# EAGLE board Master Shield (EAGLE 9.1.3)
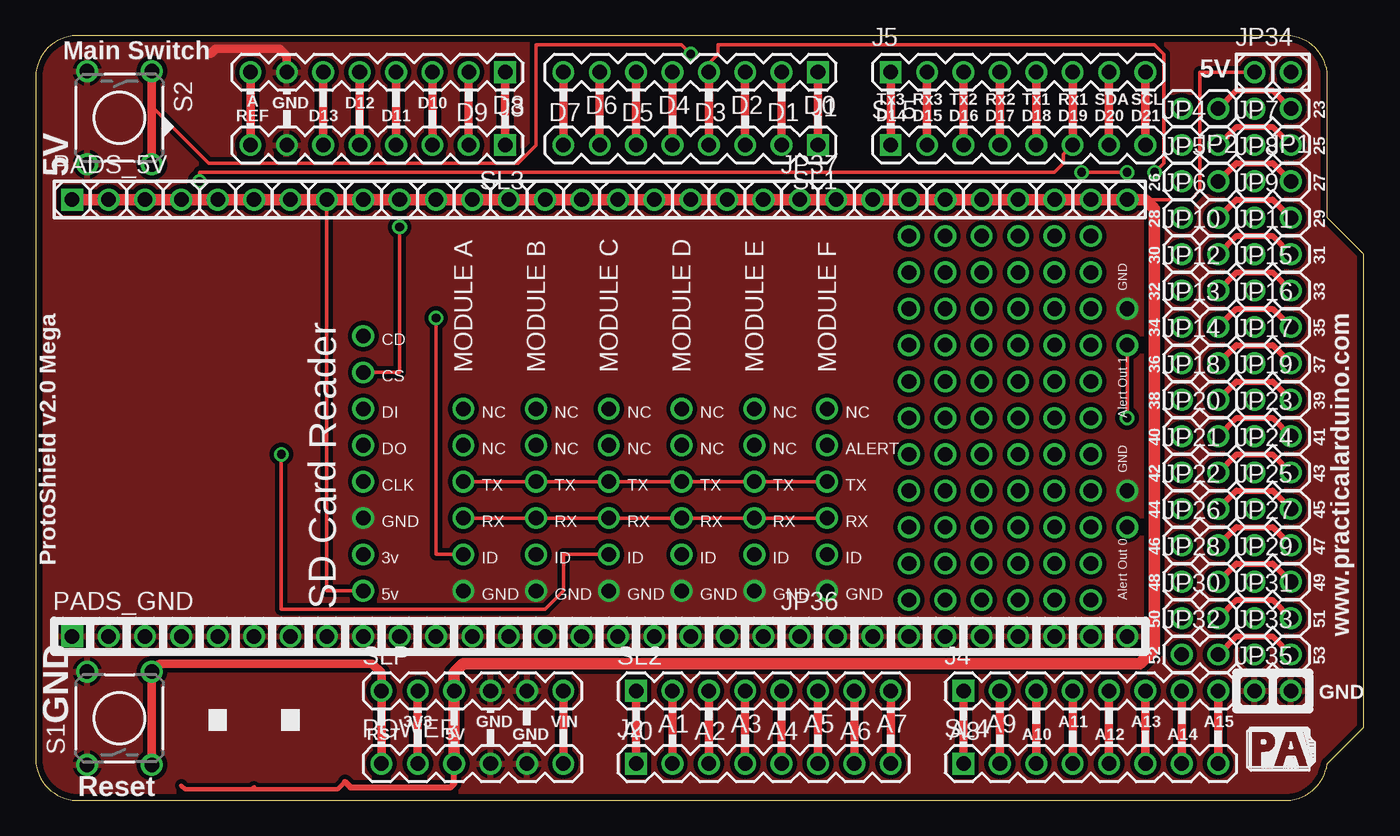
[diagram p0: board, top side]
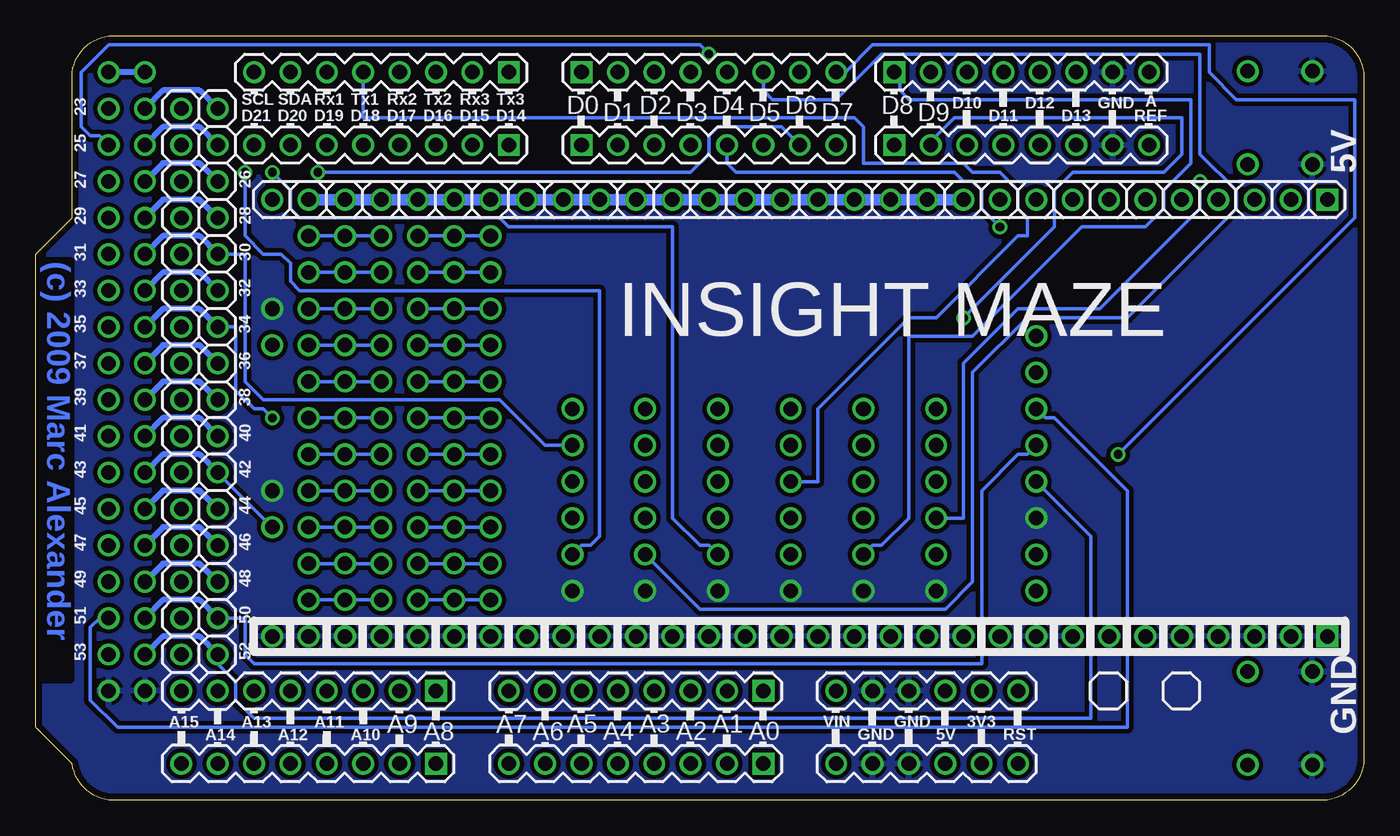
[diagram p1: board, bottom side, seen from below]

Size 92.71 x 53.34 mm. Coordinates in mm from the lower left corner, seen from the top.
Outline: 0,2.54 arc74 2.54,0 87.63,0 arc74 90.17,2.54 92.71,5.08 92.71,38.1 90.17,40.64 90.17,50.8 arc74 87.63,53.34 2.54,53.34 arc74 0,50.8 0,2.54
Copper layers (1*16): Top 0.035mm / dielectric 1.5mm / Bottom 0.035mm
Design rules "default *": minimum track width 10mil, minimum drill 24mil, track to track 12mil, track to pad 12mil, pad to pad 12mil, via to via 12mil, smd to smd 8mil, copper to edge 18mil, drill to drill 8mil, minimum pad ring 10mil, minimum via ring 8mil, stop-mask expansion 4mil, vias tented up to drill 0mil, thermal gap 10mil

## Footprints (pad centres in the part's own frame; a part is rotated, then mirrored left to right if it is on the bottom)
1X08 = drill 1.016 square: 1 0,0 | drill 1.016: 2 2.54,0; 3 5.08,0; 4 7.62,0; 5 10.16,0; 6 12.7,0; 7 15.24,0; 8 17.78,0
1X02 = drill 1.016: 1 0,0; 2 2.54,0
1X10 = drill 1.016: 1 0,0; 2 2.54,0; 3 5.08,0; 4 7.62,0; 5 10.16,0; 6 12.7,0; 7 15.24,0; 8 17.78,0; 9 20.32,0; 10 22.86,0
1X20 = drill 1.016 square: 1 0,0 | drill 1.016: 2 2.54,0; 3 5.08,0; 4 7.62,0; 5 10.16,0; 6 12.7,0; 7 15.24,0; 8 17.78,0; 9 20.32,0; 10 22.86,0; 11 25.4,0; 12 27.94,0; 13 30.48,0; 14 33.02,0; 15 35.56,0; 16 38.1,0; 17 40.64,0; 18 43.18,0; 19 45.72,0; 20 48.26,0
1X06 = drill 1.016: 1 0,0; 2 2.54,0; 3 5.08,0; 4 7.62,0; 5 10.16,0; 6 12.7,0
TACTILE-PTH = drill 1.016: 1 -3.251,2.261; 2 3.251,2.261; 3 -3.251,-2.261; 4 3.251,-2.261

## Placement (x,y rotation side)
J1  Digital_0_7  [1X08]  54.61,50.8 180 top
J2  Analog  [1X08]  41.91,2.54 0 top
J3  Digital_8_13  [1X08]  32.77,50.8 180 top
J4  Analog  [1X08]  64.77,7.62 0 top
J5  Digital_14_21  [1X08]  59.69,50.8 0 top
JP1  [1X02]  87.63,48.26 180 top
JP2  [1X02]  82.55,48.26 180 top
JP4  [1X02]  80.01,45.72 0 top
JP5  [1X02]  80.01,43.18 0 top
JP6  [1X02]  80.01,40.64 0 top
JP7  [1X02]  85.09,45.72 0 top
JP8  [1X02]  85.09,43.18 0 top
JP9  [1X02]  85.09,40.64 0 top
JP10  [1X02]  80.01,38.1 0 top
JP11  [1X02]  85.09,38.1 0 top
JP12  [1X02]  80.01,35.56 0 top
JP13  [1X02]  80.01,33.02 0 top
JP14  [1X02]  80.01,30.48 0 top
JP15  [1X02]  85.09,35.56 0 top
JP16  [1X02]  85.09,33.02 0 top
JP17  [1X02]  85.09,30.48 0 top
JP18  [1X02]  80.01,27.94 0 top
JP19  [1X02]  85.09,27.94 0 top
JP20  [1X02]  80.01,25.4 0 top
JP21  [1X02]  80.01,22.86 0 top
JP22  [1X02]  80.01,20.32 0 top
JP23  [1X02]  85.09,25.4 0 top
JP24  [1X02]  85.09,22.86 0 top
JP25  [1X02]  85.09,20.32 0 top
JP26  [1X02]  80.01,17.78 0 top
JP27  [1X02]  85.09,17.78 0 top
JP28  [1X02]  80.01,15.24 0 top
JP29  [1X02]  85.09,15.24 0 top
JP30  [1X02]  80.01,12.7 0 top
JP31  [1X02]  85.09,12.7 0 top
JP32  [1X02]  80.01,10.16 0 top
JP33  [1X02]  85.09,10.16 0 top
JP34  [1X02]  85.09,50.8 0 top
JP35  [1X02]  85.09,7.62 0 top
JP36  M100.1  [1X10]  53.34,11.43 0 top
JP37  M100.1  [1X10]  53.34,41.91 0 top
PADS_5V  M20  [1X20]  2.54,41.91 0 top
PADS_GND  M20  [1X20]  2.54,11.43 0 top
POWER  Power  [1X06]  24.13,2.54 0 top
S1  RESET  [TACTILE-PTH]  5.84,5.71 90 top
S2  SWITCH  [TACTILE-PTH]  5.84,47.62 270 top
SL1  Digital_0_7  [1X08]  54.61,45.72 180 top
SL2  Analog  [1X08]  41.91,7.62 0 top
SL3  Digital_8_13  [1X08]  32.77,45.72 180 top
SL4  Analog  [1X08]  64.77,2.54 0 top
SL5  Digital_14_21  [1X08]  59.69,45.72 0 top
SLP  Power  [1X06]  24.13,7.62 0 top
U$4  [PRACTICALARDUINO-LOGO]  84.58,2.03 0 top

## Library data of the parts
J1-J5 JP1 JP2 JP4-JP37 PADS_5V PADS_GND POWER S1 S2 SL1-SL5 SLP U$4 = SparkFun

## Nets
3V3: POWER.2 SLP.2
5V: JP34.1 JP34.2 JP37.1 JP37.2 JP37.3 JP37.4 JP37.5 JP37.6 JP37.7 JP37.8 JP37.9 JP37.10 PADS_5V.1 PADS_5V.2 PADS_5V.3 PADS_5V.4 PADS_5V.5 PADS_5V.6 PADS_5V.7 PADS_5V.8 PADS_5V.9 PADS_5V.10 PADS_5V.11 PADS_5V.12 PADS_5V.13 PADS_5V.14 PADS_5V.15 PADS_5V.16 PADS_5V.17 PADS_5V.18 PADS_5V.19 PADS_5V.20 POWER.3 SLP.3
A0: J2.1 SL2.1
A1: J2.2 SL2.2
A2: J2.3 SL2.3
A3: J2.4 SL2.4
A4: J2.5 SL2.5
A5: J2.6 SL2.6
A6: J2.7 SL2.7
A7: J2.8 SL2.8
A8: J4.1 SL4.1
A9: J4.2 SL4.2
A10: J4.3 SL4.3
A11: J4.4 SL4.4
A12: J4.5 SL4.5
A13: J4.6 SL4.6
A14: J4.7 SL4.7
A15: J4.8 SL4.8
AREF: J3.8 SL3.8
D0_RX: J1.1 SL1.1
D1: JP10.2 JP11.2
D1_TX: J1.2 SL1.2
D2: J1.3 SL1.3
D3: J1.4 SL1.4
D4: J1.5 SL1.5
D5: J1.6 SL1.6
D6: J1.7 SL1.7
D7: J1.8 SL1.8
D8: J3.1 SL3.1
D9: J3.2 SL3.2
D10: J3.3 SL3.3
D11: JP10.1 JP11.1
D11_MOSI: J3.4 SL3.4
D12: JP18.2 JP19.2
D12_MISO: J3.5 SL3.5
D13: JP18.1 JP19.1
D13_SCK: J3.6 SL3.6
D14: JP26.2 JP27.2
D14_TX3: J5.8 SL5.8
D15: JP26.1 JP27.1
D15_RX3: J5.7 SL5.7
D16: JP30.2 JP31.2
D16_TX2: J5.6 SL5.6
D17: JP30.1 JP31.1
D17_RX2: J5.5 SL5.5
D18_TX1: J5.4 SL5.4
D19_RX1: J5.3 SL5.3
D20_SDA: J5.2 SL5.2
D21_SCL: J5.1 SL5.1
D22: JP1.2 JP2.2
D23: JP1.1 JP2.1
GND: J3.7 JP35.1 JP35.2 JP36.1 JP36.2 JP36.3 JP36.4 JP36.5 JP36.6 JP36.7 JP36.8 JP36.9 JP36.10 PADS_GND.1 PADS_GND.2 PADS_GND.3 PADS_GND.4 PADS_GND.5 PADS_GND.6 PADS_GND.7 PADS_GND.8 PADS_GND.9 PADS_GND.10 PADS_GND.11 PADS_GND.12 PADS_GND.13 PADS_GND.14 PADS_GND.15 PADS_GND.16 PADS_GND.17 PADS_GND.18 PADS_GND.19 PADS_GND.20 POWER.4 POWER.5 S1.1 S1.2 S2.3 S2.4 SL3.7 SLP.4 SLP.5
N$337: JP4.1 JP7.1
N$338: JP4.2 JP7.2 S2.1 S2.2
N$339: JP5.1 JP8.1
N$340: JP5.2 JP8.2
N$341: JP6.1 JP9.1
N$342: JP6.2 JP9.2
N$343: JP12.1 JP15.1
N$344: JP12.2 JP15.2
N$345: JP13.1 JP16.1
N$346: JP13.2 JP16.2
N$347: JP14.1 JP17.1
N$348: JP14.2 JP17.2
N$349: JP20.1 JP23.1
N$350: JP20.2 JP23.2
N$351: JP21.1 JP24.1
N$352: JP21.2 JP24.2
N$353: JP22.1 JP25.1
N$354: JP22.2 JP25.2
N$355: JP28.1 JP29.1
N$356: JP28.2 JP29.2
N$357: JP32.1 JP33.1
N$358: JP32.2 JP33.2
RESET: POWER.1 S1.3 S1.4 SLP.1
VIN: POWER.6 SLP.6

## Tracks (layer width: path | path; a pad name or v marks a point on that pad's centre or on a via)
3V3
  Top 0.61: POWER.2 SLP.2
5V  (via drill 1.02)
  Top 0.254: v22.86,14.61 20.32,14.61 PADS_5V.8 | JP34.1 81.28,50.8 81.28,42.55 80.64,41.91 77.47,41.91
  Top 0.305: 21.59,1.27 21.08,0.76 15.11,0.76 | 15.11,0.76 10.41,0.76 10.16,1.02 | 15.11,0.76 15.24,0.89
  Top 0.406: 21.59,1.27 21.97,0.89 28.96,0.89 29.21,1.14 POWER.3
  Top 0.813: POWER.3 SLP.3 29.21,8.89 29.84,9.53 77.09,9.53 78.11,10.54 78.11,41.27 77.47,41.91 JP37.10 JP37.9 JP37.8 JP37.7 JP37.6 JP37.5 JP37.4 JP37.3 JP37.2 JP37.1 PADS_5V.20 PADS_5V.19 PADS_5V.18 PADS_5V.17 PADS_5V.16 PADS_5V.15 PADS_5V.14 PADS_5V.13 PADS_5V.12 PADS_5V.11 PADS_5V.10 PADS_5V.9 PADS_5V.8 PADS_5V.7 PADS_5V.6 PADS_5V.5 PADS_5V.4 PADS_5V.3 PADS_5V.2 PADS_5V.1
  Bottom 0.406: JP34.1 JP34.2
  Bottom 0.813: PADS_5V.11 PADS_5V.18 JP37.9
A0
  Top 0.61: J2.1 SL2.1
A1
  Top 0.61: J2.2 SL2.2
A2
  Top 0.61: J2.3 SL2.3
A3
  Top 0.61: J2.4 SL2.4
A4
  Top 0.61: J2.5 SL2.5
A5
  Top 0.61: J2.6 SL2.6
A6
  Top 0.61: J2.7 SL2.7
A7
  Top 0.61: J2.8 SL2.8
A8
  Top 0.61: SL4.1 J4.1
A9
  Top 0.61: SL4.2 J4.2
A10
  Top 0.61: SL4.3 J4.3
A11
  Top 0.61: SL4.4 J4.4
A12
  Top 0.61: SL4.5 J4.5
A13
  Top 0.61: SL4.6 J4.6
A14
  Top 0.61: SL4.7 J4.7
A15
  Top 0.61: SL4.8 J4.8
AREF
  Top 0.61: SL3.8 J3.8
D0_RX
  Top 0.61: SL1.1 J1.1
D1
  Top 0.406: JP10.2 83.82,39.37 86.36,39.37 JP11.2
D1_TX
  Top 0.61: SL1.2 J1.2
D2
  Top 0.61: SL1.3 J1.3
D3  (via drill 0.61, 1.02)
  Top 0.254: v78.11,43.81 78.74,44.45 78.74,52.07 78.11,52.7 47.62,52.7 47.62,52.07 46.99,51.44 J1.4
  Top 0.61: SL1.4 J1.4
  Bottom 0.254: v55.24,17.14 54.61,17.78 53.98,17.78 53.34,18.41 53.34,35.56 74.3,35.56 74.93,36.2 74.93,37.47 75.56,38.1 76.83,38.1 78.11,39.37 v78.11,43.81
D4  (via drill 0.61, 1.02)
  Top 0.254: v22.86,29.84 25.4,29.84 v25.4,40.01
  Top 0.61: SL1.5 J1.5
  Bottom 0.254: v25.4,40.01 26.67,41.27 26.67,42.55 27.3,43.18 27.94,43.18 28.57,43.81 43.81,43.81 44.45,44.45 SL1.5
D5  (via drill 1.02)
  Top 0.61: SL1.6 J1.6
  Bottom 0.254: v50.16,17.14 46.35,13.34 29.21,13.34 27.3,15.24 27.3,29.84 23.5,33.66 16.51,33.66 8.89,41.27 8.89,42.55 11.43,45.09 11.43,52.07 33.66,52.07 36.83,48.9 41.27,48.9 41.91,49.53 J1.6
D6  (via drill 0.61, 1.02)
  Top 0.254: v73.03,43.81 v76.2,43.81
  Top 0.61: SL1.7 J1.7
  Bottom 0.254: v45.09,17.14 45.72,17.78 46.35,17.78 48.26,19.68 48.26,40.01 59.69,40.01 60.33,40.64 74.3,40.64 74.93,41.27 74.93,42.55 v76.2,43.81 | v73.03,43.81 46.99,43.81 45.72,45.09 45.72,46.35 45.09,46.99 40.64,46.99 SL1.7
D7  (via drill 0.61, 1.02)
  Top 0.254: v40.01,17.14 36.83,17.14 36.83,14.61 35.56,13.34 17.14,13.34 v17.14,24.13
  Top 0.61: SL1.8 J1.8
  Bottom 0.254: v17.14,24.13 0.64,40.64 0.64,48.9 8.89,48.9 10.79,50.8 10.79,52.7 34.29,52.7 36.2,50.8 J1.8
D8  (via drill 1.02)
  Top 0.61: SL3.1 J3.1
  Bottom 0.254: v34.92,17.14 34.29,17.78 33.66,17.78 31.75,19.68 31.75,32.38 27.3,32.38 19.68,40.01 15.24,40.01 13.97,41.27 13.97,42.55 12.06,44.45 12.06,48.9 31.75,48.9 32.38,49.53 32.38,50.8 J3.1
D9  (via drill 0.61, 1.02)
  Top 0.254: v29.84,17.14 27.94,17.14 v27.94,33.66
  Top 0.61: SL3.2 J3.2
  Bottom 0.254: v27.94,33.66 21.59,40.01 21.59,42.55 20.32,43.81 13.97,43.81 12.7,45.09 12.7,47.62 28.57,47.62 30.48,45.72 SL3.2
D10
  Top 0.61: SL3.3 J3.3
D11  (via drill 1.02)
  Bottom 0.254: v55.24,24.77 57.15,24.77 60.33,27.94 76.83,27.94 78.11,29.21 78.11,38.1 JP10.1
  Bottom 0.406: JP10.1 81.28,39.37 83.82,39.37 JP11.1
D11_MOSI
  Top 0.61: SL3.4 J3.4
D12
  Top 0.406: JP19.2 86.36,29.21 83.82,29.21 JP18.2
D12_MISO
  Top 0.61: SL3.5 J3.5
D13
  Bottom 0.406: JP18.1 81.28,29.21 83.82,29.21 JP19.1
D13_SCK
  Top 0.61: SL3.6 J3.6
D14
  Top 0.406: JP27.2 86.36,19.05 83.82,19.05 JP26.2
D14_TX3
  Top 0.61: SL5.8 J5.8
D15
  Bottom 0.406: JP26.1 81.28,19.05 83.82,19.05 JP27.1
D15_RX3
  Top 0.61: SL5.7 J5.7
D16  (via drill 1.02)
  Top 0.406: JP31.2 86.36,13.97 83.82,13.97 JP30.2
  Bottom 0.254: v22.86,27.3 22.23,26.67 21.59,26.67 16.51,21.59 16.51,5.08 87,5.08 88.9,6.99 88.9,12.06 88.27,12.7 JP31.2
D16_TX2  (via drill 0.61, 1.02)
  Top 0.254: v55.24,19.68 v50.16,19.68 v45.09,19.68 v40.01,19.68 v34.92,19.68 v29.84,19.68 | SL5.6 71.75,45.09 71.75,44.45 71.12,43.81 11.43,43.81 v11.43,43.18
  Top 0.61: SL5.6 J5.6
  Bottom 0.254: v11.43,43.18 11.43,41.27 18.41,34.29 24.13,34.29 27.94,30.48 27.94,19.68 v29.84,19.68
D17  (via drill 1.02)
  Bottom 0.254: v22.86,24.77 23.5,24.13 24.13,24.13 26.67,21.59 26.67,9.53 77.47,9.53 78.11,10.16 78.11,12.7 JP30.1
  Bottom 0.406: JP30.1 81.28,13.97 83.82,13.97 JP31.1
D17_RX2  (via drill 1.02)
  Top 0.254: v55.24,22.23 v50.16,22.23 v45.09,22.23 v40.01,22.23 v34.92,22.23 v29.84,22.23
  Top 0.61: SL5.5 J5.5
  Bottom 0.254: J5.5 69.85,47.62 35.56,47.62 34.92,46.99 34.92,44.45 27.94,44.45 27.3,43.81 25.4,43.81 24.13,42.55 24.13,41.27 23.5,40.64 23.5,39.37 24.13,39.37 29.84,33.66 31.75,33.66 38.1,27.3 38.1,22.23 v40.01,22.23
D18_TX1
  Top 0.61: SL5.4 J5.4
D19_RX1
  Top 0.61: SL5.3 J5.3
D20_SDA
  Top 0.61: SL5.2 J5.2
D21_SCL
  Top 0.61: SL5.1 J5.1
D22
  Bottom 0.406: JP2.2 81.28,49.53 83.82,49.53 JP1.2
D23
  Top 0.406: JP1.1 86.36,49.53 83.82,49.53 JP2.1
GND  (via drill 1.02)
  Top 0.61: 12.2,52.08 12.57,52.45 17.02,52.45 17.53,51.94 J3.7
  other vias: 29.84,14.61 34.92,14.61 40.01,14.61 45.09,14.61 50.16,14.61 55.24,14.61 22.86,19.68 76.2,34.29 76.2,21.59
  pour Bottom: 0,50.8 arc-74 2.54,53.34 87.63,53.34 arc-74 90.17,50.8 90.17,40.64 92.71,38.1 92.71,5.08 90.17,2.54 arc-74 87.63,0 2.54,0 arc-90 0,2.54
  pour Top: 0,50.8 arc-74 2.54,53.34 87.63,53.34 arc-74 90.17,50.8 90.17,40.64 92.71,38.1 92.71,5.08 90.17,2.54 arc-74 87.63,0 2.54,0 arc-74 0,2.54
N$79  (via drill 1.02)
  other vias: 50.16,24.77
N$81  (via drill 1.02)
  other vias: 45.09,24.77
N$83  (via drill 1.02)
  other vias: 40.01,24.77
N$85  (via drill 1.02)
  other vias: 34.92,24.77
N$93  (via drill 1.02)
  other vias: 55.24,27.3
N$95  (via drill 1.02)
  other vias: 50.16,27.3
N$97  (via drill 1.02)
  other vias: 45.09,27.3
N$99  (via drill 1.02)
  other vias: 40.01,27.3
N$101  (via drill 1.02)
  other vias: 34.92,27.3
N$151  (via drill 1.02)
  Bottom 0.254: v68.58,13.97 v71.12,13.97 v73.66,13.97
N$219  (via drill 1.02)
  other vias: 29.84,24.77
N$220  (via drill 1.02)
  other vias: 29.84,27.3
N$237  (via drill 1.02)
  other vias: 22.86,32.38
N$243  (via drill 1.02)
  other vias: 22.86,17.14
N$248  (via drill 1.02)
  Bottom 0.254: v60.96,13.97 v63.5,13.97 v66.04,13.97
N$251  (via drill 1.02)
  Bottom 0.254: v68.58,16.51 v71.12,16.51 v73.66,16.51
N$254  (via drill 1.02)
  Bottom 0.254: v60.96,16.51 v63.5,16.51 v66.04,16.51
N$257  (via drill 1.02)
  Bottom 0.254: v68.58,19.05 v71.12,19.05 v73.66,19.05
N$260  (via drill 1.02)
  Bottom 0.254: v60.96,19.05 v63.5,19.05 v66.04,19.05
N$263  (via drill 1.02)
  Bottom 0.254: v68.58,21.59 v71.12,21.59 v73.66,21.59
N$266  (via drill 1.02)
  Bottom 0.254: v60.96,21.59 v63.5,21.59 v66.04,21.59
N$269  (via drill 1.02)
  Bottom 0.254: v68.58,24.13 v71.12,24.13 v73.66,24.13
N$272  (via drill 1.02)
  Bottom 0.254: v60.96,24.13 v63.5,24.13 v66.04,24.13
N$275  (via drill 1.02)
  Bottom 0.254: v68.58,26.67 v71.12,26.67 v73.66,26.67
N$278  (via drill 1.02)
  Bottom 0.254: v60.96,26.67 v63.5,26.67 v66.04,26.67
N$281  (via drill 1.02)
  Bottom 0.254: v68.58,29.21 v71.12,29.21 v73.66,29.21
N$284  (via drill 1.02)
  Bottom 0.254: v60.96,29.21 v63.5,29.21 v66.04,29.21
N$287  (via drill 1.02)
  Bottom 0.254: v68.58,31.75 v71.12,31.75 v73.66,31.75
N$290  (via drill 1.02)
  Bottom 0.254: v60.96,31.75 v63.5,31.75 v66.04,31.75
N$293  (via drill 1.02)
  Bottom 0.254: v68.58,34.29 v71.12,34.29 v73.66,34.29
N$296  (via drill 1.02)
  Bottom 0.254: v60.96,34.29 v63.5,34.29 v66.04,34.29
N$322  (via drill 1.02)
  Bottom 0.254: v68.58,36.83 v71.12,36.83 v73.66,36.83
N$325  (via drill 1.02)
  Bottom 0.254: v60.96,36.83 v63.5,36.83 v66.04,36.83
N$328  (via drill 1.02)
  Bottom 0.254: v68.58,39.37 v71.12,39.37 v73.66,39.37
N$331  (via drill 1.02)
  Bottom 0.254: v60.96,39.37 v63.5,39.37 v66.04,39.37
N$337
  Bottom 0.406: JP4.1 81.28,46.99 83.82,46.99 JP7.1
N$338  (via drill 0.61)
  Top 0.254: v45.72,52.07 45.09,52.7 34.92,52.7 34.92,45.72 33.66,44.45 12.06,44.45 8.26,48.26 8.1,48.26
  Top 0.406: JP7.2 86.36,46.99 83.82,46.99 JP4.2
  Top 0.61: S2.2 8.1,48.26 S2.1
  Bottom 0.254: JP7.2 88.27,46.35 88.9,46.35 89.53,46.99 89.53,50.8 87.63,52.7 46.35,52.7 v45.72,52.07
N$339
  Bottom 0.406: JP5.1 81.28,44.45 83.82,44.45 JP8.1
N$340
  Top 0.406: JP8.2 86.36,44.45 83.82,44.45 JP5.2
N$341
  Bottom 0.406: JP6.1 81.28,41.91 83.82,41.91 JP9.1
N$342
  Top 0.406: JP9.2 86.36,41.91 83.82,41.91 JP6.2
N$343
  Bottom 0.406: JP12.1 81.28,36.83 83.82,36.83 JP15.1
N$344
  Top 0.406: JP15.2 86.36,36.83 83.82,36.83 JP12.2
N$345  (via drill 0.61, 1.02)
  Top 0.254: v76.2,26.67 v76.2,31.75
  Bottom 0.254: v76.2,26.67 76.83,27.3 77.47,27.3 78.74,28.57 78.74,33.02 JP13.1
  Bottom 0.406: JP13.1 81.28,34.29 83.82,34.29 JP16.1
N$346
  Top 0.406: JP13.2 83.82,34.29 86.36,34.29 JP16.2
N$347
  Bottom 0.406: JP14.1 81.28,31.75 83.82,31.75 JP17.1
N$348
  Top 0.406: JP17.2 86.36,31.75 83.82,31.75 JP14.2
N$349
  Bottom 0.406: JP20.1 81.28,26.67 83.82,26.67 JP23.1
N$350
  Top 0.406: JP23.2 86.36,26.67 83.82,26.67 JP20.2
N$351  (via drill 1.02)
  Bottom 0.254: JP21.1 v76.2,19.05
  Bottom 0.406: JP21.1 81.28,24.13 83.82,24.13 JP24.1
N$352
  Top 0.406: JP24.2 86.36,24.13 83.82,24.13 JP21.2
N$353
  Bottom 0.406: JP22.1 81.28,21.59 83.82,21.59 JP25.1
N$354
  Top 0.406: JP25.2 86.36,21.59 83.82,21.59 JP22.2
N$355
  Bottom 0.406: JP28.1 81.28,16.51 83.82,16.51 JP29.1
N$356
  Top 0.406: JP28.2 83.82,16.51 86.36,16.51 JP29.2
N$357  (via drill 1.02)
  Bottom 0.254: v22.86,22.23 19.05,18.41 19.05,5.71 77.47,5.71 78.74,6.99 78.74,8.26 80.01,9.53 JP32.1
  Bottom 0.406: JP32.1 81.28,11.43 83.82,11.43 JP33.1
N$358
  Top 0.406: JP32.2 83.82,11.43 86.36,11.43 JP33.2
RESET
  Top 0.61: POWER.1 SLP.1 24.13,8.89 23.5,9.53 8.66,9.53 S1.4 S1.3
VIN
  Top 0.61: POWER.6 SLP.6

## Text on the board
Bottom: (c) 2009 Marc Alexander
tPlace: Main Switch | 5V | Tx3 | Rx3 | Tx2 | Rx2 | Tx1 | Rx1 | SDA | SCL | A | GND | D12 | D10 | D8 | D6 | D4 | D2 | D0 | 23 | REF | D13 | D11 | D9 | D7 | D5 | D3 | D1 | D14 | D15 | D16 | D17 | D18 | D19 | D20 | D21 | 25 | 5V | 26 | 27 | 28 | 29 | 30 | 31 | GND | 32 | 33 | CD | 34 | 35 | MODULE A | MODULE B | MODULE C | MODULE D | MODULE E | MODULE F | 36 | 37 | CS | DI | NC | NC | NC | NC | NC | NC | Alert Out 1 | 38 | 39 | 40 | 41 | DO | NC | NC | NC | NC | NC | ALERT | GND | CLK | TX | TX | TX | TX | TX | TX | 42 | 43 | 44 | 45 | GND | RX | RX | RX | RX | RX | RX | 3v | ID | ID | ID | ID | ID | ID | 46 | 47 | ProtoShield v2.0 Mega | 48 | 49 | 5v | GND | GND | GND | GND | GND | GND | Alert Out 0 | SD Card Reader | 50 | 51 | www.practicalarduino.com | 52 | 53 | GND | GND | 3V3 | GND | VIN | A1 | A3 | A5 | A7 | A9 | A11 | A13 | A15 | RST | 5V | GND | A0 | A2 | A4 | A6 | A8 | A10 | A12 | A14 | Reset
bPlace: Tx3 | Rx3 | Tx2 | Rx2 | Tx1 | Rx1 | SDA | SCL | 23 | A | GND | D12 | D10 | D8 | D6 | D4 | D2 | D0 | 5V | REF | D13 | D11 | D9 | D7 | D5 | D3 | D1 | D14 | D15 | D16 | D17 | D18 | D19 | D20 | D21 | 25 | 26 | 27 | 28 | 29 | 30 | 31 | 32 | 33 | 34 | 35 | INSIGHT MAZE | 36 | 37 | 38 | 39 | 40 | 41 | 42 | 43 | 44 | 45 | 46 | 47 | 48 | 49 | 50 | 51 | 52 | 53 | GND | 3V3 | GND | VIN | A1 | A3 | A5 | A7 | A9 | A11 | A13 | A15 | RST | 5V | GND | A0 | A2 | A4 | A6 | A8 | A10 | A12 | A14